# Altium PCB PCB1.PcbDoc (part 1 of 6)
Units mm, origin at the board's own origin, x right, y up, seen from the top; angles counter-clockwise.
Board outline 1473.2 x 504.06 mm, 4 copper layers (Top Layer, MidLayer1, MidLayer2, Bottom Layer); 162 components, 222 nets, 4894 pads, 2213 vias.
Unrouted connection lines stored in the file: 216.
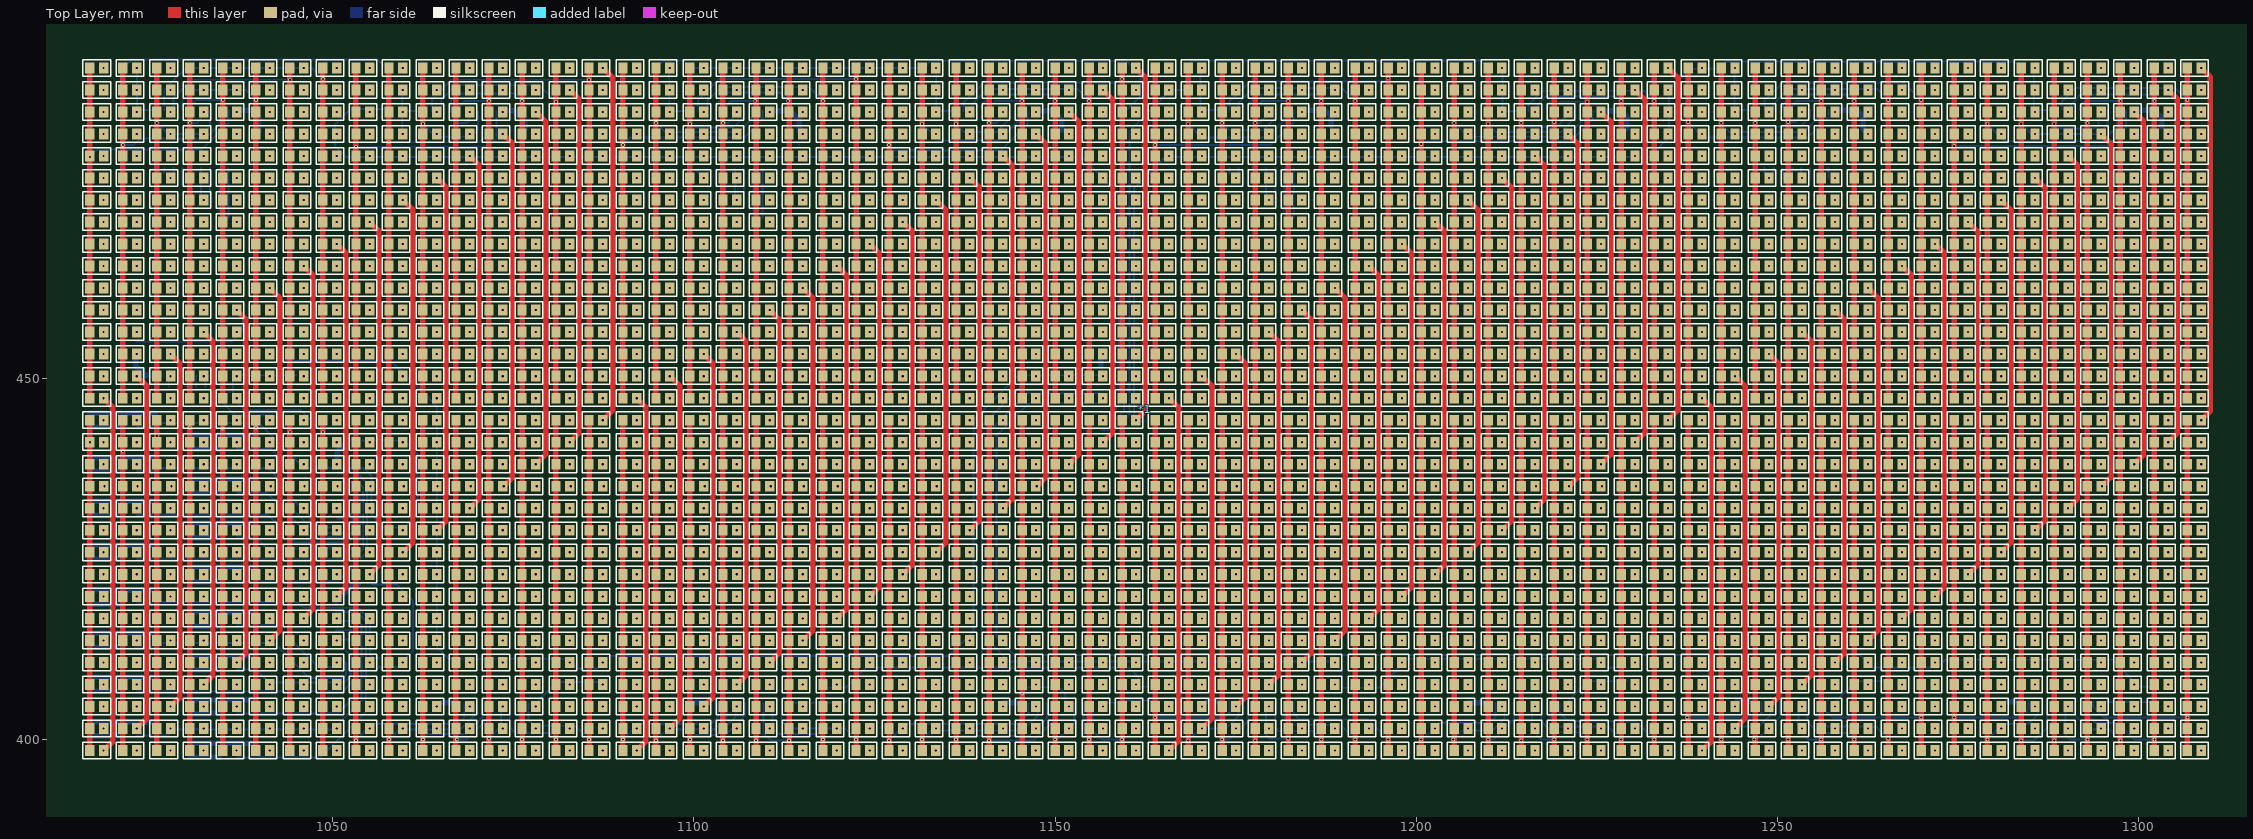
[diagram p0: Top Layer view]
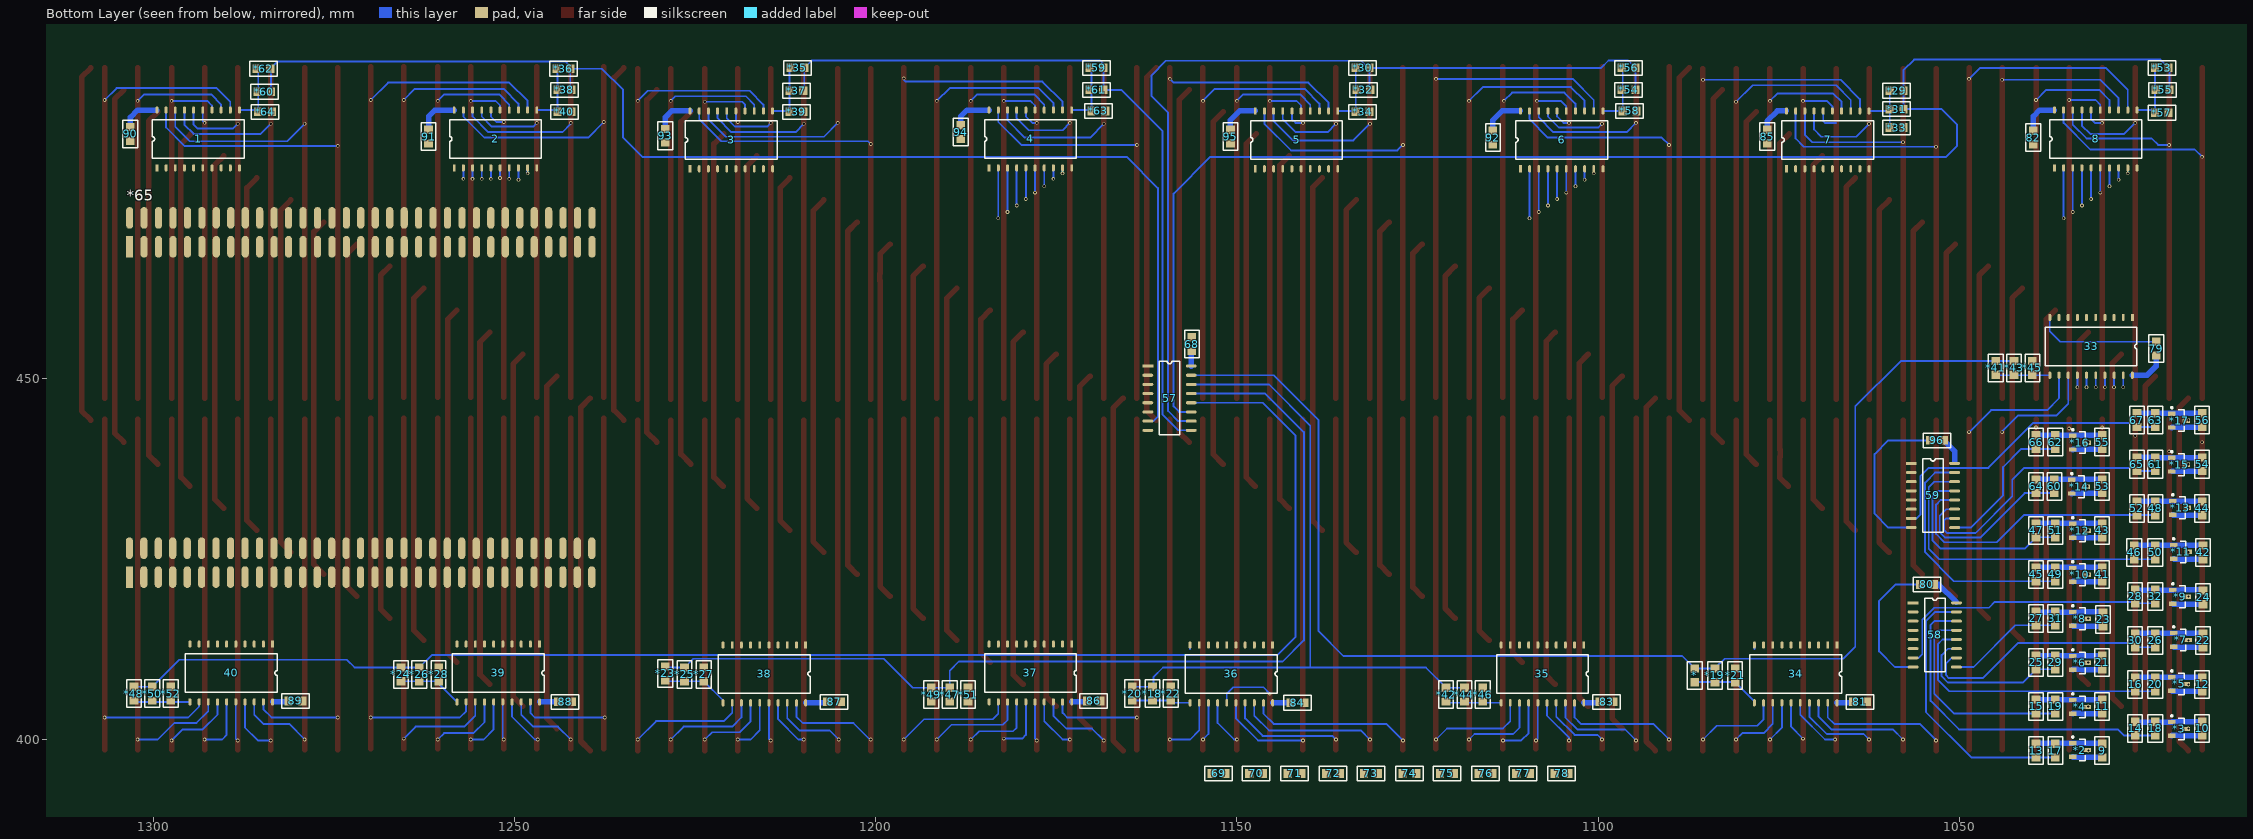
[diagram p1: Bottom Layer view, seen from below]
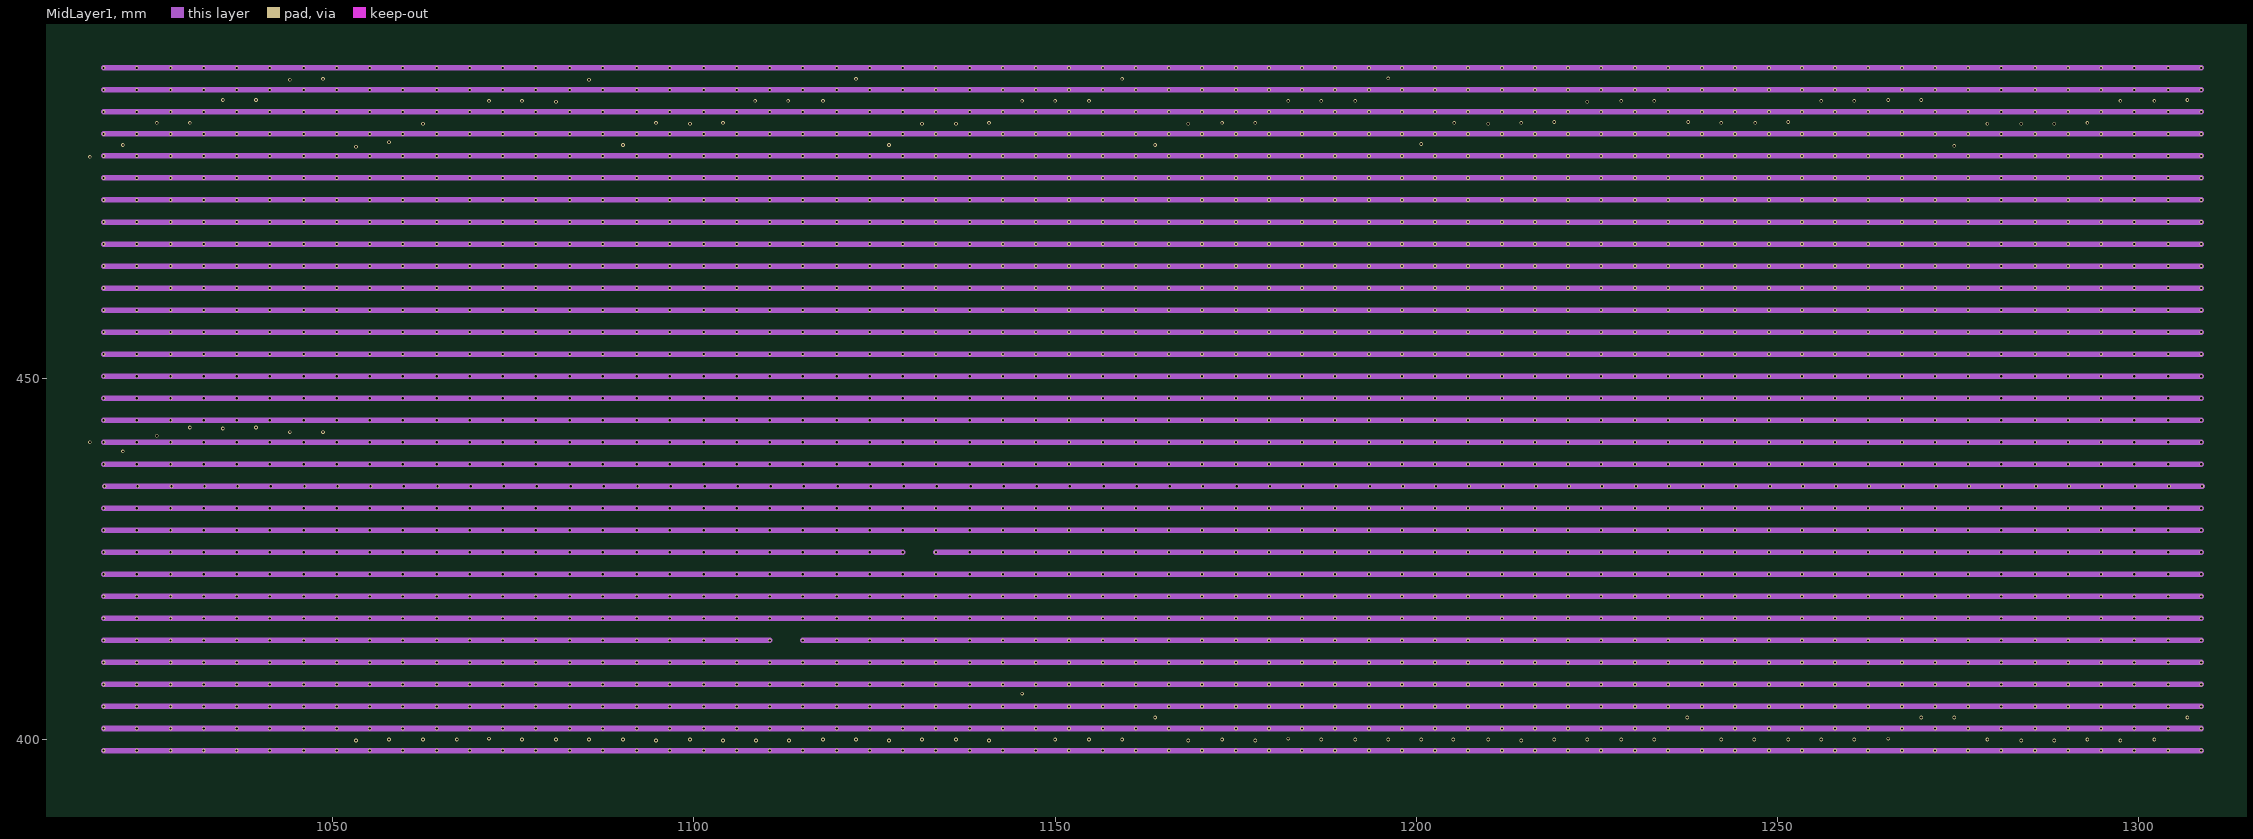
[diagram p2: MidLayer1]
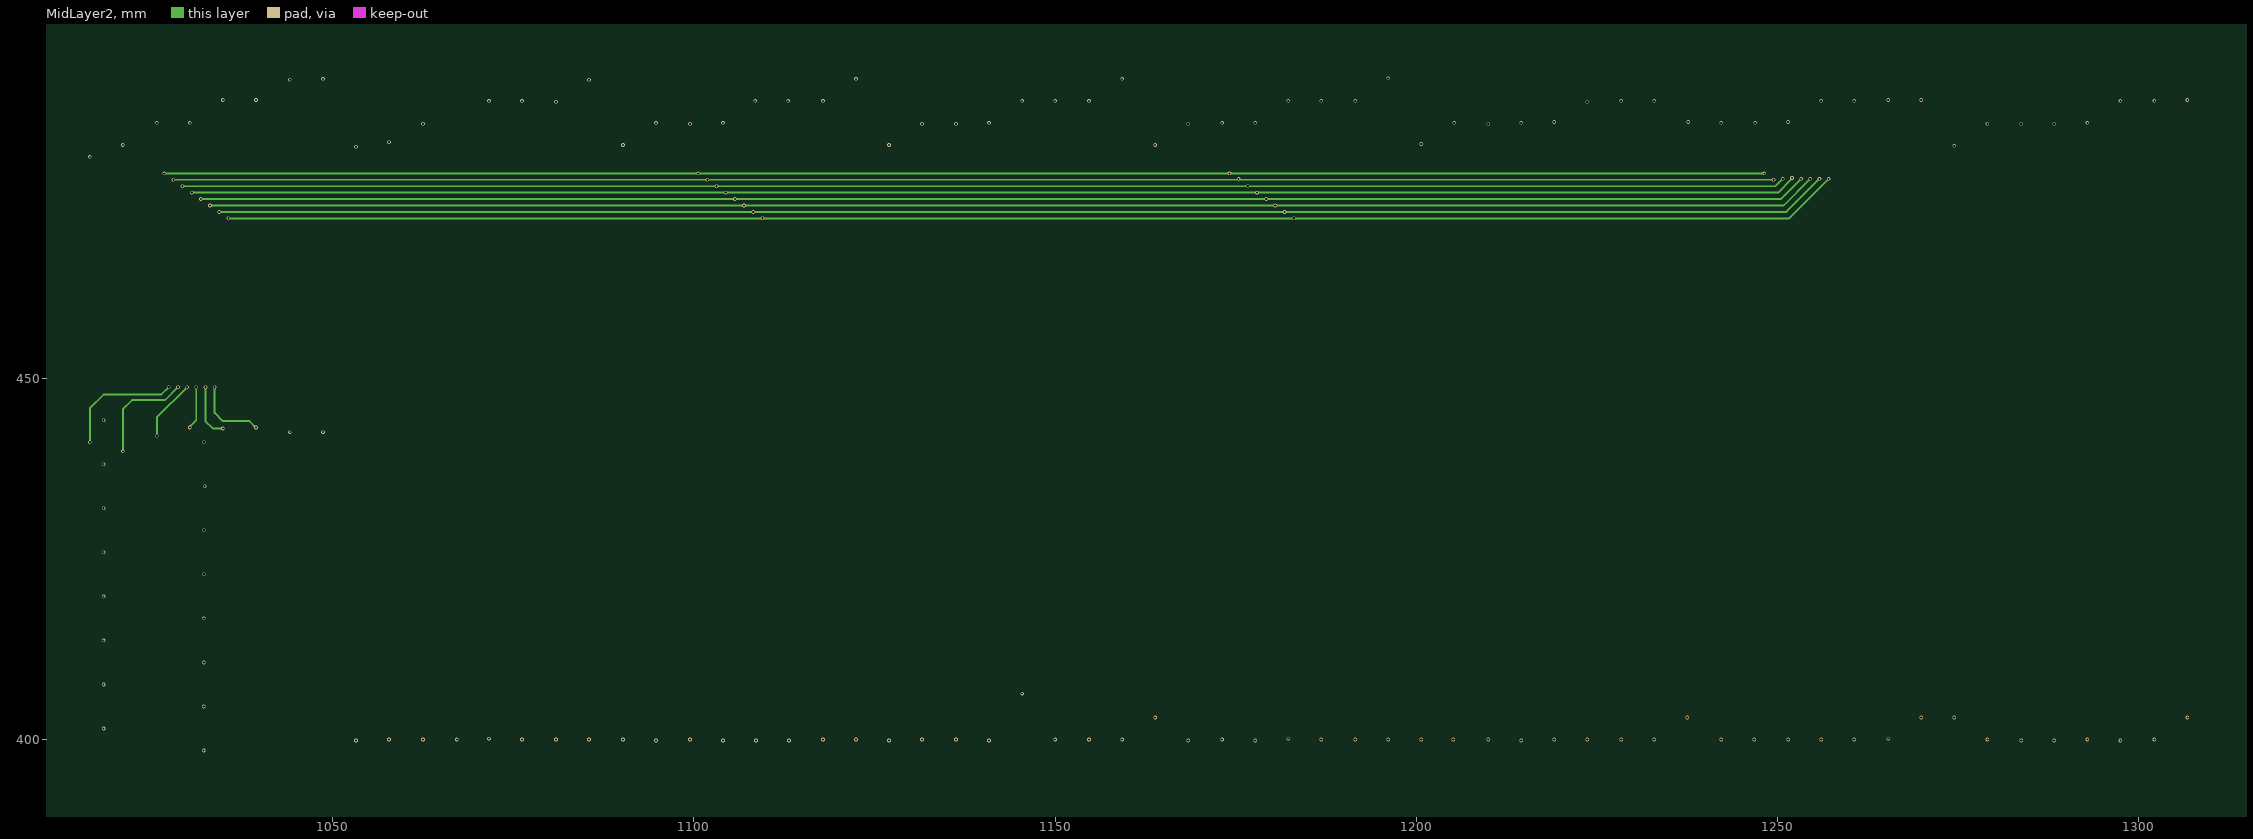
[diagram p3: MidLayer2]

## Layer stack, top to bottom
Top Solder: solder mask 0.0102, Solder Resist, Dk 3.5
Top Layer: signal copper 0.0356
Dielectric1: core 0.32, FR-4, Dk 4.8
MidLayer1: signal copper 0.0356
Dielectric2: prepreg 0.32, FR-4, Dk 4.8
MidLayer2: signal copper 0.0356
Dielectric3: core 0.32, FR-4, Dk 4.8
Bottom Layer: signal copper 0.0356
Bottom Solder: solder mask 0.0102, Solder Resist, Dk 3.5

## Board outline
306.705,715.137 306.705,212.979 1778,212.979 1779.905,211.074 1666.621,324.358 1666.621,713.105 308.737,713.105 306.705,715.137

## Design rules (kind name [scope] priority, off if disabled: settings)
Clearance [All] p1: gap=0.254
FabricationTestPointUsage TestPointUsage [All] p1: valid=0 allowmultiple=FALSE
FabricationTestpoint Testpoint [All] p1: side=3 testpointundercomponent=TRUE minsize=1.016 maxsize=2.54 preferedsize=1.524 minholesize=0 maxholesize=1.016 preferedholesize=0.813 testpointgrid=0.025 allowsidetop=TRUE allowsidebottom=TRUE usegrid=TRUE gridtolerance=0
PolygonConnect [All] p1: connectstyle=Relief reliefconductorwidth=0.254 reliefentries=4 polygonreliefangle="90 Angle" airgapwidth=0.254
RoutingVias [All] p1: holewidth=0.711 width=1.27 viastyle="Through Hole" minholewidth=0.711 minwidth=1.27 maxholewidth=0.711 maxwidth=1.27
SolderMaskExpansion [All] p1: expansion=0.102
Width Width_1 [InNet('AOG0','AOG1','AOG2','AOG3','AOG4','AOG5','AOG6','AOG7','AOG8','AOG9','AOG10','AOG11','AOG12','AOG13','AOG14','AOG15')] p1: maxlimit=0.254 minlimit=0.254 preferedwidth=0.254
Width [All] p2: maxlimit=0.762 minlimit=0.254 preferedwidth=0.254
28 further rules are at their usual default settings.

## Components (designator, comment, footprint, x,y, rotation, side; value= is the part's Value field where it differs from the comment)
1 "SN74LVTH574" SN74LVTH574 1299.464,479.171 r90 bottom
2 "SN74LVTH574" SN74LVTH574 1258.316,479.171 r90 bottom
3 "SN74LVTH574" SN74LVTH574 1225.677,479.044 r90 bottom
4 "SN74LVTH574" SN74LVTH574 1184.275,479.171 r90 bottom
5 "SN74LVTH574" SN74LVTH574 1147.445,479.044 r90 bottom
6 "SN74LVTH574" SN74LVTH574 1110.742,479.044 r90 bottom
7 "SN74LVTH574" SN74LVTH574 1073.912,479.044 r90 bottom
8 "SN74LVTH574" SN74LVTH574 1036.828,479.171 r90 bottom
9 "560Ohm" 104 1030.224,398.526 r270 bottom
10 "560Ohm" 104 1016.381,401.574 r270 bottom
11 "560Ohm" 104 1030.224,404.622 r270 bottom
12 "560Ohm" 104 1016.381,407.67 r270 bottom
13 "20Ohm" 104 1039.368,398.526 r270 bottom
14 "20Ohm" 104 1025.652,401.574 r270 bottom
15 "20Ohm" 104 1039.368,404.622 r270 bottom
16 "20Ohm" 104 1025.652,407.67 r270 bottom
17 "104" 104 1036.696,398.526 r90 bottom
18 "104" 104 1022.863,401.574 r90 bottom
19 "104" 104 1036.701,404.622 r90 bottom
20 "104" 104 1022.863,407.67 r90 bottom
21 "560Ohm" 104 1030.224,410.718 r270 bottom
22 "560Ohm" 104 1016.254,413.766 r270 bottom
23 "560Ohm" 104 1030.097,416.687 r270 bottom
24 "560Ohm" 104 1016.254,419.735 r270 bottom
25 "20Ohm" 104 1039.368,410.718 r270 bottom
26 "20Ohm" 104 1022.863,413.766 r270 bottom
27 "20Ohm" 104 1039.368,416.814 r270 bottom
28 "20Ohm" 104 1025.652,419.862 r270 bottom
29 "104" 104 1036.701,410.718 r90 bottom
30 "104" 104 1025.652,413.766 r90 bottom
31 "104" 104 1036.701,416.814 r90 bottom
32 "104" 104 1022.863,419.862 r90 bottom
33 "SN74LVTH574" SN74LVTH574 1026.033,458.47 r270 bottom
34 "SN74LVTH574" SN74LVTH574 1066.927,413.131 r270 bottom
35 "SN74LVTH574" SN74LVTH574 1101.979,413.131 r270 bottom
36 "SN74LVTH574" SN74LVTH574 1145.032,413.131 r270 bottom
37 "SN74LVTH574" SN74LVTH574 1172.845,413.258 r270 bottom
38 "SN74LVTH574" SN74LVTH574 1209.675,413.131 r270 bottom
39 "SN74LVTH574" SN74LVTH574 1246.505,413.258 r270 bottom
40 "SN74LVTH574" SN74LVTH574 1283.462,413.258 r270 bottom
41 "560Ohm" 104 1030.224,422.91 r270 bottom
42 "560Ohm" 104 1016.254,425.958 r270 bottom
43 "560Ohm" 104 1030.224,429.006 r270 bottom
44 "560Ohm" 104 1016.381,432.054 r270 bottom
45 "20Ohm" 104 1039.368,422.91 r270 bottom
46 "20Ohm" 104 1025.779,425.958 r270 bottom
47 "20Ohm" 104 1039.368,429.006 r270 bottom
48 "20Ohm" 104 1022.853,432.054 r270 bottom
49 "104" 104 1036.701,422.91 r90 bottom
50 "104" 104 1022.863,425.958 r90 bottom
51 "104" 104 1036.701,429.006 r90 bottom
52 "104" 104 1025.398,432.054 r90 bottom
53 "560Ohm" 104 1030.224,435.102 r270 bottom
54 "560Ohm" 104 1016.381,438.15 r270 bottom
55 "560Ohm" 104 1030.224,441.198 r270 bottom
56 "560Ohm" 104 1016.381,444.246 r270 bottom
57 "MC74AC138" MC74AC138 1162.304,451.739 r180 bottom
58 "MC74AC138" MC74AC138 1056.386,418.973 r180 bottom
59 "MC74AC138" MC74AC138 1056.64,438.277 r180 bottom
60 "20Ohm" 104 1036.828,435.102 r270 bottom
61 "20Ohm" 104 1022.863,438.15 r270 bottom
62 "20Ohm" 104 1036.701,441.198 r270 bottom
63 "20Ohm" 104 1022.863,444.246 r270 bottom
64 "104" 104 1039.368,435.102 r90 bottom
65 "104" 104 1025.398,438.15 r90 bottom
66 "104" 104 1039.368,441.198 r90 bottom
67 "104" 104 1025.398,444.246 r90 bottom
68 "104" 104 1156.208,454.787 r90 bottom
69 "104" 104 1152.525,395.351 r180 bottom
70 "104" 104 1147.318,395.351 r180 bottom
71 "104" 104 1141.984,395.351 r180 bottom
72 "104" 104 1136.65,395.351 r180 bottom
73 "104" 104 1131.443,395.351 r180 bottom
74 "104" 104 1126.109,395.351 r180 bottom
75 "104" 104 1120.902,395.351 r180 bottom
76 "104" 104 1115.568,395.351 r180 bottom
77 "104" 104 1110.361,395.351 r180 bottom
78 "104" 104 1105.027,395.351 r180 bottom
79 "104" 104 1022.731,454.152 r90 bottom
80 "104" 104 1054.481,421.513 r0 bottom
81 "104" 104 1063.752,405.257 r180 bottom
82 "104" 104 1039.749,483.362 r270 bottom
83 "104" 104 1098.804,405.257 r180 bottom
84 "104" 104 1141.603,405.13 r180 bottom
85 "104" 104 1076.579,483.489 r270 bottom
86 "104" 104 1169.797,405.384 r180 bottom
87 "104" 104 1205.738,405.257 r180 bottom
88 "104" 104 1242.949,405.257 r180 bottom
89 "104" 104 1280.287,405.384 r180 bottom
90 "104" 104 1303.147,483.87 r270 bottom
91 "104" 104 1261.872,483.489 r270 bottom
92 "104" 104 1114.552,483.362 r270 bottom
93 "104" 104 1229.106,483.616 r270 bottom
94 "104" 104 1188.212,484.124 r270 bottom
95 "104" 104 1150.874,483.489 r270 bottom
96 "104" 104 1053.084,441.452 r0 bottom
* "30PF" 104 1086.612,408.94 r270 bottom
*1 "LED_3264" LED_3264 1291.463,493.395 r0 top
*2 "AO3401" AO3401 1034.288,399.542 r180 bottom
*3 "AO3401" AO3401 1020.572,402.463 r180 bottom
*4 "AO3401" AO3401 1034.288,405.511 r180 bottom
*5 "AO3401" AO3401 1020.572,408.686 r180 bottom
*6 "AO3401" AO3401 1034.288,411.607 r180 bottom
*7 "AO3401" AO3401 1020.318,414.782 r180 bottom
*8 "AO3401" AO3401 1034.288,417.703 r180 bottom
*9 "AO3401" AO3401 1020.445,420.751 r180 bottom
*10 "AO3401" AO3401 1034.288,423.799 r180 bottom
*11 "AO3401" AO3401 1020.318,426.974 r180 bottom
*12 "AO3401" AO3401 1034.288,429.895 r180 bottom
*13 "AO3401" AO3401 1020.445,433.07 r180 bottom
*14 "AO3401" AO3401 1034.415,435.991 r180 bottom
*15 "AO3401" AO3401 1020.572,439.039 r180 bottom
*16 "AO3401" AO3401 1034.288,442.087 r180 bottom
*17 "AO3401" AO3401 1020.572,445.135 r180 bottom
*18 "30PF" 104 1161.669,406.4 r270 bottom
*19 "1KOhm" 104 1083.818,408.94 r270 bottom
*20 "1KOhm" 104 1164.463,406.4 r270 bottom
*21 "10kOhm" 104 1081.024,408.94 r270 bottom
*22 "10kOhm" 104 1159.129,406.4 r270 bottom
*23 "30PF" 104 1229.106,409.194 r270 bottom
*24 "30PF" 104 1265.682,409.067 r270 bottom
*25 "1KOhm" 104 1226.439,409.067 r270 bottom
*26 "1KOhm" 104 1263.142,409.067 r270 bottom
*27 "10kOhm" 104 1223.772,409.067 r270 bottom
*28 "10kOhm" 104 1260.475,409.067 r270 bottom
*29 "30PF" 104 1058.672,489.839 r0 bottom
*30 "30PF" 104 1132.586,493.014 r0 bottom
*31 "1KOhm" 104 1058.672,487.299 r0 bottom
*32 "1KOhm" 104 1132.459,489.966 r0 bottom
*33 "10kOhm" 104 1058.672,484.759 r0 bottom
*34 "10kOhm" 104 1132.586,486.918 r0 bottom
*35 "30PF" 104 1210.818,493.014 r0 bottom
*36 "30PF" 104 1243.203,492.887 r0 bottom
*37 "1KOhm" 104 1210.945,489.839 r0 bottom
*38 "1KOhm" 104 1243.076,489.966 r0 bottom
*39 "10kOhm" 104 1210.945,486.918 r0 bottom
*40 "10kOhm" 104 1243.076,486.918 r0 bottom
*41 "30PF" 104 1044.956,451.485 r270 bottom
*42 "30PF" 104 1121.029,406.273 r270 bottom
*43 "1KOhm" 104 1042.416,451.485 r270 bottom
*44 "1KOhm" 104 1118.489,406.273 r270 bottom
*45 "10kOhm" 104 1039.876,451.485 r270 bottom
*46 "10kOhm" 104 1115.949,406.273 r270 bottom
*47 "30PF" 104 1189.736,406.273 r270 bottom
*48 "30PF" 104 1302.639,406.4 r270 bottom
*49 "1KOhm" 104 1192.276,406.273 r270 bottom
*50 "1KOhm" 104 1300.099,406.4 r270 bottom
*51 "10kOhm" 104 1187.196,406.273 r270 bottom
*52 "10kOhm" 104 1297.559,406.4 r270 bottom
*53 "30PF" 104 1021.969,493.014 r0 bottom
*54 "30PF" 104 1095.756,489.966 r0 bottom
*55 "1KOhm" 104 1021.842,489.966 r0 bottom
*56 "1KOhm" 104 1095.756,493.014 r0 bottom
*57 "10kOhm" 104 1021.969,486.791 r0 bottom
*58 "10kOhm" 104 1095.629,487.045 r0 bottom
*59 "30PF" 104 1169.416,493.014 r0 bottom
*60 "30PF" 104 1284.605,489.712 r0 bottom
*61 "1KOhm" 104 1169.416,489.966 r0 bottom
*62 "1KOhm" 104 1284.732,492.887 r0 bottom
*63 "10kOhm" 104 1169.162,487.045 r0 bottom
*64 "10kOhm" 104 1284.478,486.918 r0 bottom
*65 "STM32F407ZET6" STM32F407ZET6 1271.397,447.167 r90 bottom

## Footprints (in the part's own frame and the unit in brackets; to place one, negate y for a bottom-side part, rotate by r counter-clockwise, add the part's x,y. Pads: shape width x height; smd on the part's side, far side on the other; paste and mask are expansions set on the pad)
104 [mm]
  rect 1.14x1.2 smd: 1(-0.95,0) 2(0.95,0)
  silkscreen extent -1.91,-1.02 1.91,1.02
AO3401 [mm]
  rect 1x0.6 smd: 1(2,-0.95) 2(0,0) 3(0,-1.9)
  silkscreen extent -0.13,-2.45 1.7,0.97
LED_3264 [mm]